# EAGLE board medi_10_cpx (EAGLE 6.0)

Size 76.2 x 68.58 mm. Coordinates in mm from the lower left corner, seen from the top.
Outline: 0,0 0,68.58 76.2,68.58 76.2,0 0,0
Copper layers (1*16): Top 0.035mm / dielectric 1.5mm / Bottom 0.035mm
Design rules: minimum track width 10mil, minimum drill 24mil, track to track 8mil, track to pad 8mil, pad to pad 8mil, via to via 8mil, smd to smd 8mil, copper to edge 40mil, drill to drill 8mil, minimum pad ring 10mil, minimum via ring 8mil, stop-mask expansion 4mil, vias tented up to drill 0mil, thermal gap 10mil
Holes 3.2 mm at 7.62,7.62 7.62,60.96 68.58,7.62 68.58,60.96

## Footprints (pad centres in the part's own frame; a part is rotated, then mirrored left to right if it is on the bottom)
LED5MM = drill 0.813 octagon: A -1.27,0; K 1.27,0
1X01 = drill 1.016 octagon: 1 0,0

## Placement (x,y rotation side)
00  [LED5MM]  3.81,3.81 0 top
01  [LED5MM]  11.43,3.81 0 top
02  [LED5MM]  19.05,3.81 0 top
03  [LED5MM]  26.67,3.81 0 top
04  [LED5MM]  34.29,3.81 0 top
05  [LED5MM]  41.91,3.81 0 top
06  [LED5MM]  49.53,3.81 0 top
07  [LED5MM]  57.15,3.81 0 top
08  [LED5MM]  64.77,3.81 0 top
09  [LED5MM]  72.39,3.81 0 top
10  [LED5MM]  3.81,11.43 0 top
11  [LED5MM]  11.43,11.43 0 top
12  [LED5MM]  19.05,11.43 0 top
13  [LED5MM]  26.67,11.43 0 top
14  [LED5MM]  34.29,11.43 0 top
15  [LED5MM]  41.91,11.43 0 top
16  [LED5MM]  49.53,11.43 0 top
17  [LED5MM]  57.15,11.43 0 top
18  [LED5MM]  64.77,11.43 0 top
19  [LED5MM]  72.39,11.43 0 top
20  [LED5MM]  3.81,19.05 0 top
21  [LED5MM]  11.43,19.05 0 top
22  [LED5MM]  19.05,19.05 0 top
23  [LED5MM]  26.67,19.05 0 top
24  [LED5MM]  34.29,19.05 0 top
25  [LED5MM]  41.91,19.05 0 top
26  [LED5MM]  49.53,19.05 0 top
27  [LED5MM]  57.15,19.05 0 top
28  [LED5MM]  64.77,19.05 0 top
29  [LED5MM]  72.39,19.05 0 top
30  [LED5MM]  3.81,26.67 0 top
31  [LED5MM]  11.43,26.67 0 top
32  [LED5MM]  19.05,26.67 0 top
33  [LED5MM]  26.67,26.67 0 top
34  [LED5MM]  34.29,26.67 0 top
35  [LED5MM]  41.91,26.67 0 top
36  [LED5MM]  49.53,26.67 0 top
37  [LED5MM]  57.15,26.67 0 top
38  [LED5MM]  64.77,26.67 0 top
39  [LED5MM]  72.39,26.67 0 top
40  [LED5MM]  3.81,34.29 0 top
41  [LED5MM]  11.43,34.29 0 top
42  [LED5MM]  19.05,34.29 0 top
43  [LED5MM]  26.67,34.29 0 top
44  [LED5MM]  34.29,34.29 0 top
45  [LED5MM]  41.91,34.29 0 top
46  [LED5MM]  49.53,34.29 0 top
47  [LED5MM]  57.15,34.29 0 top
48  [LED5MM]  64.77,34.29 0 top
49  [LED5MM]  72.39,34.29 0 top
50  [LED5MM]  3.81,41.91 0 top
51  [LED5MM]  11.43,41.91 0 top
52  [LED5MM]  19.05,41.91 0 top
53  [LED5MM]  26.67,41.91 0 top
54  [LED5MM]  34.29,41.91 0 top
55  [LED5MM]  41.91,41.91 0 top
56  [LED5MM]  49.53,41.91 0 top
57  [LED5MM]  57.15,41.91 0 top
58  [LED5MM]  64.77,41.91 0 top
59  [LED5MM]  72.39,41.91 0 top
60  [LED5MM]  3.81,49.53 0 top
61  [LED5MM]  11.43,49.53 0 top
62  [LED5MM]  19.05,49.53 0 top
63  [LED5MM]  26.67,49.53 0 top
64  [LED5MM]  34.29,49.53 0 top
65  [LED5MM]  41.91,49.53 0 top
66  [LED5MM]  49.53,49.53 0 top
67  [LED5MM]  57.15,49.53 0 top
68  [LED5MM]  64.77,49.53 0 top
69  [LED5MM]  72.39,49.53 0 top
70  [LED5MM]  3.81,57.15 0 top
71  [LED5MM]  11.43,57.15 0 top
72  [LED5MM]  19.05,57.15 0 top
73  [LED5MM]  26.67,57.15 0 top
74  [LED5MM]  34.29,57.15 0 top
75  [LED5MM]  41.91,57.15 0 top
76  [LED5MM]  49.53,57.15 0 top
77  [LED5MM]  57.15,57.15 0 top
78  [LED5MM]  64.77,57.15 0 top
79  [LED5MM]  72.39,57.15 0 top
80  [LED5MM]  3.81,64.77 0 top
81  [LED5MM]  11.43,64.77 0 top
82  [LED5MM]  19.05,64.77 0 top
83  [LED5MM]  26.67,64.77 0 top
84  [LED5MM]  34.29,64.77 0 top
85  [LED5MM]  41.91,64.77 0 top
86  [LED5MM]  49.53,64.77 0 top
87  [LED5MM]  57.15,64.77 0 top
88  [LED5MM]  64.77,64.77 0 top
89  [LED5MM]  72.39,64.77 0 top
H0  [1X01]  26.67,7.62 0 top
H1  [1X01]  29.21,7.62 0 top
H2  [1X01]  31.75,7.62 0 top
H3  [1X01]  34.29,7.62 0 top
H4  [1X01]  36.83,7.62 0 top
H5  [1X01]  39.37,7.62 0 top
H6  [1X01]  41.91,7.62 0 top
H7  [1X01]  44.45,7.62 0 top
H8  [1X01]  46.99,7.62 0 top
H9  [1X01]  49.53,7.62 0 top

## Library data of the parts
00 01-09 10-89 = led
H0 H1-H9 = pinhead

## Nets
D: 00.A 09.K 11.A 19.K 22.A 29.K 33.A 39.K 44.A 49.K 55.A 59.K 66.A 69.K 77.A 79.K 88.A 89.K H9.1
S0: 00.K 01.A 02.A 03.A 04.A 05.A 06.A 07.A 08.A 09.A 10.K 20.K 30.K 40.K 50.K 60.K 70.K 80.K H0.1
S1: 01.K 10.A 11.K 12.A 13.A 14.A 15.A 16.A 17.A 18.A 19.A 21.K 31.K 41.K 51.K 61.K 71.K 81.K H1.1
S2: 02.K 12.K 20.A 21.A 22.K 23.A 24.A 25.A 26.A 27.A 28.A 29.A 32.K 42.K 52.K 62.K 72.K 82.K H2.1
S3: 03.K 13.K 23.K 30.A 31.A 32.A 33.K 34.A 35.A 36.A 37.A 38.A 39.A 43.K 53.K 63.K 73.K 83.K H3.1
S4: 04.K 14.K 24.K 34.K 40.A 41.A 42.A 43.A 44.K 45.A 46.A 47.A 48.A 49.A 54.K 64.K 74.K 84.K H4.1
S5: 05.K 15.K 25.K 35.K 45.K 50.A 51.A 52.A 53.A 54.A 55.K 56.A 57.A 58.A 59.A 65.K 75.K 85.K H5.1
S6: 06.K 16.K 26.K 36.K 46.K 56.K 60.A 61.A 62.A 63.A 64.A 65.A 66.K 67.A 68.A 69.A 76.K 86.K H6.1
S7: 07.K 17.K 27.K 37.K 47.K 57.K 67.K 70.A 71.A 72.A 73.A 74.A 75.A 76.A 77.K 78.A 79.A 87.K H7.1
S8: 08.K 18.K 28.K 38.K 48.K 58.K 68.K 78.K 80.A 81.A 82.A 83.A 84.A 85.A 86.A 87.A 88.K 89.A H8.1

## Tracks (layer width: path | path; a pad name or v marks a point on that pad's centre or on a via)
D  (18 unrouted)
S0  (18 unrouted)
S1  (18 unrouted)
S2  (18 unrouted)
S3  (18 unrouted)
S4  (18 unrouted)
S5  (18 unrouted)
S6  (18 unrouted)
S7  (18 unrouted)
S8  (18 unrouted)